# EAGLE board bare_eval (EAGLE 6.4)
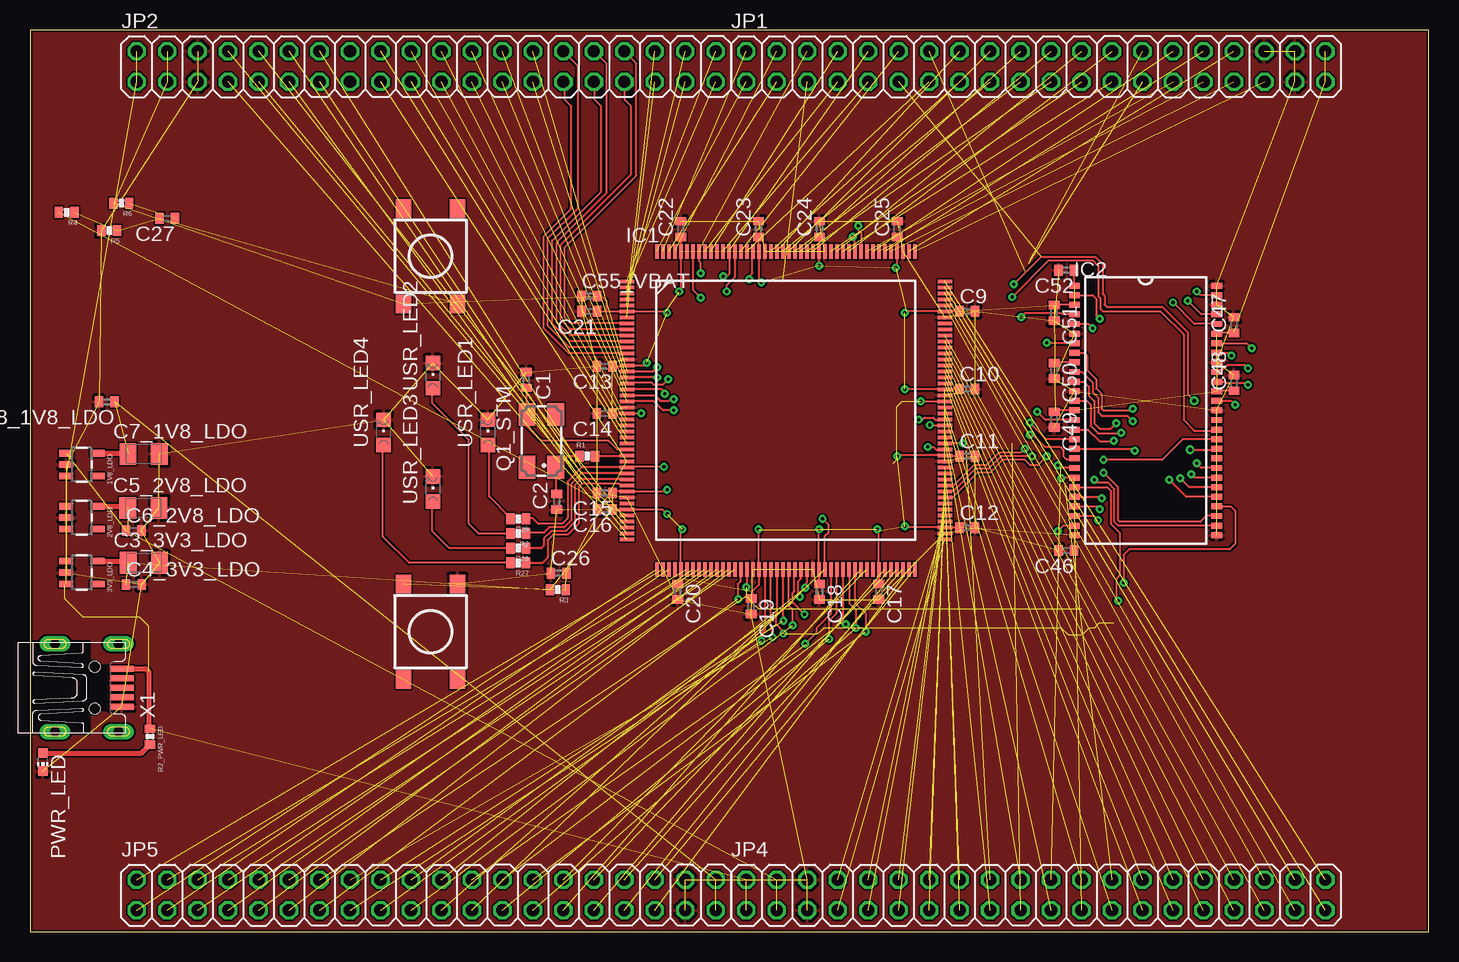
[diagram p0: board, top side]
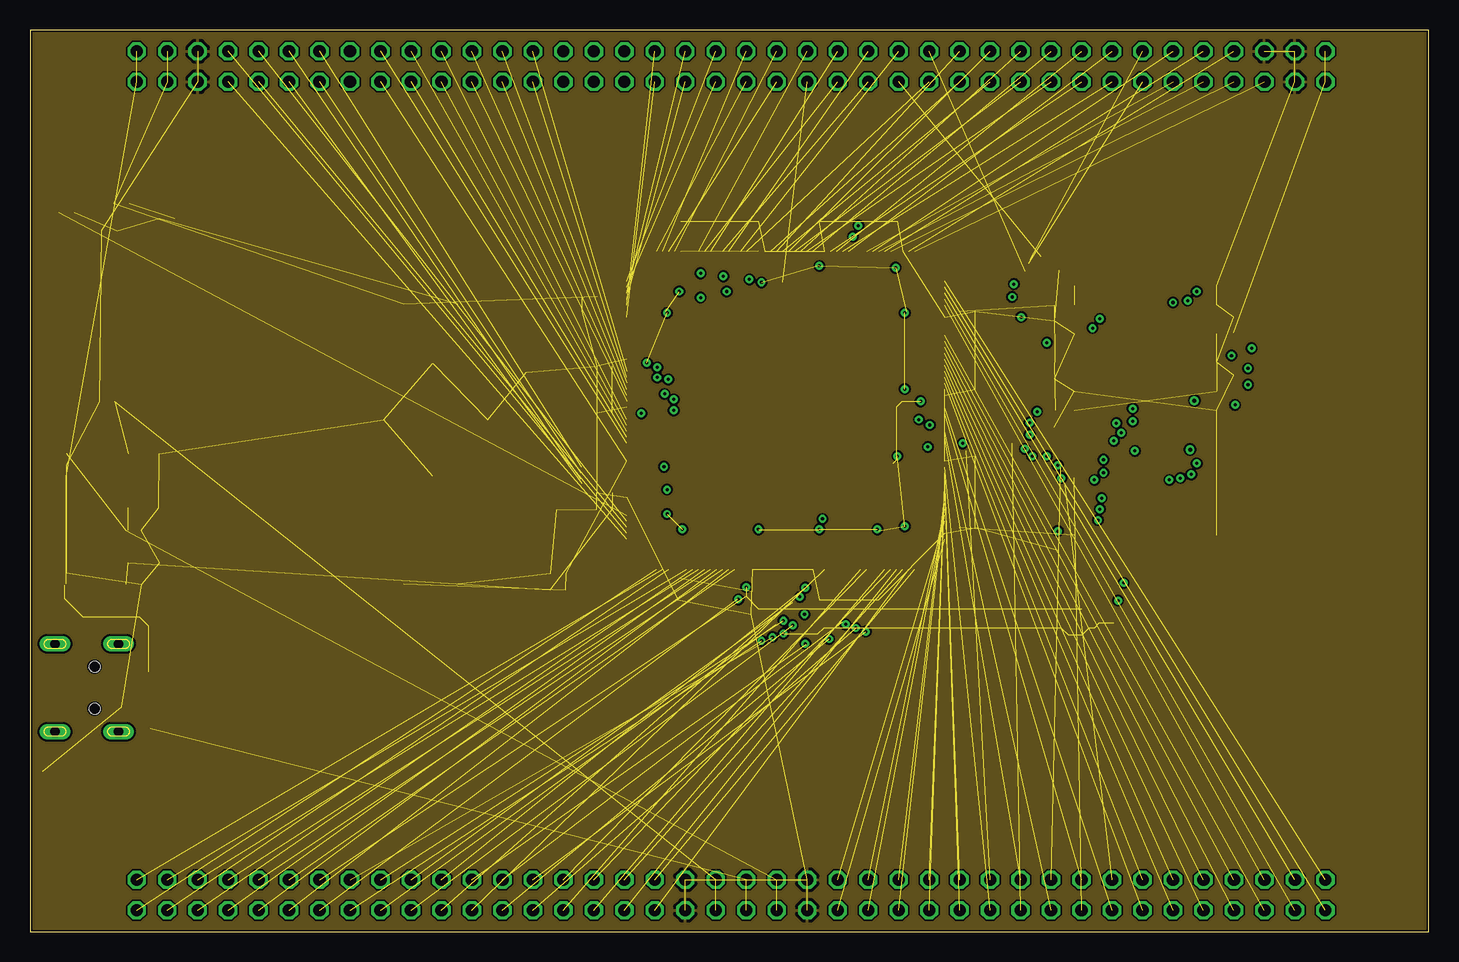
[diagram p1: board, inner layer Route2]
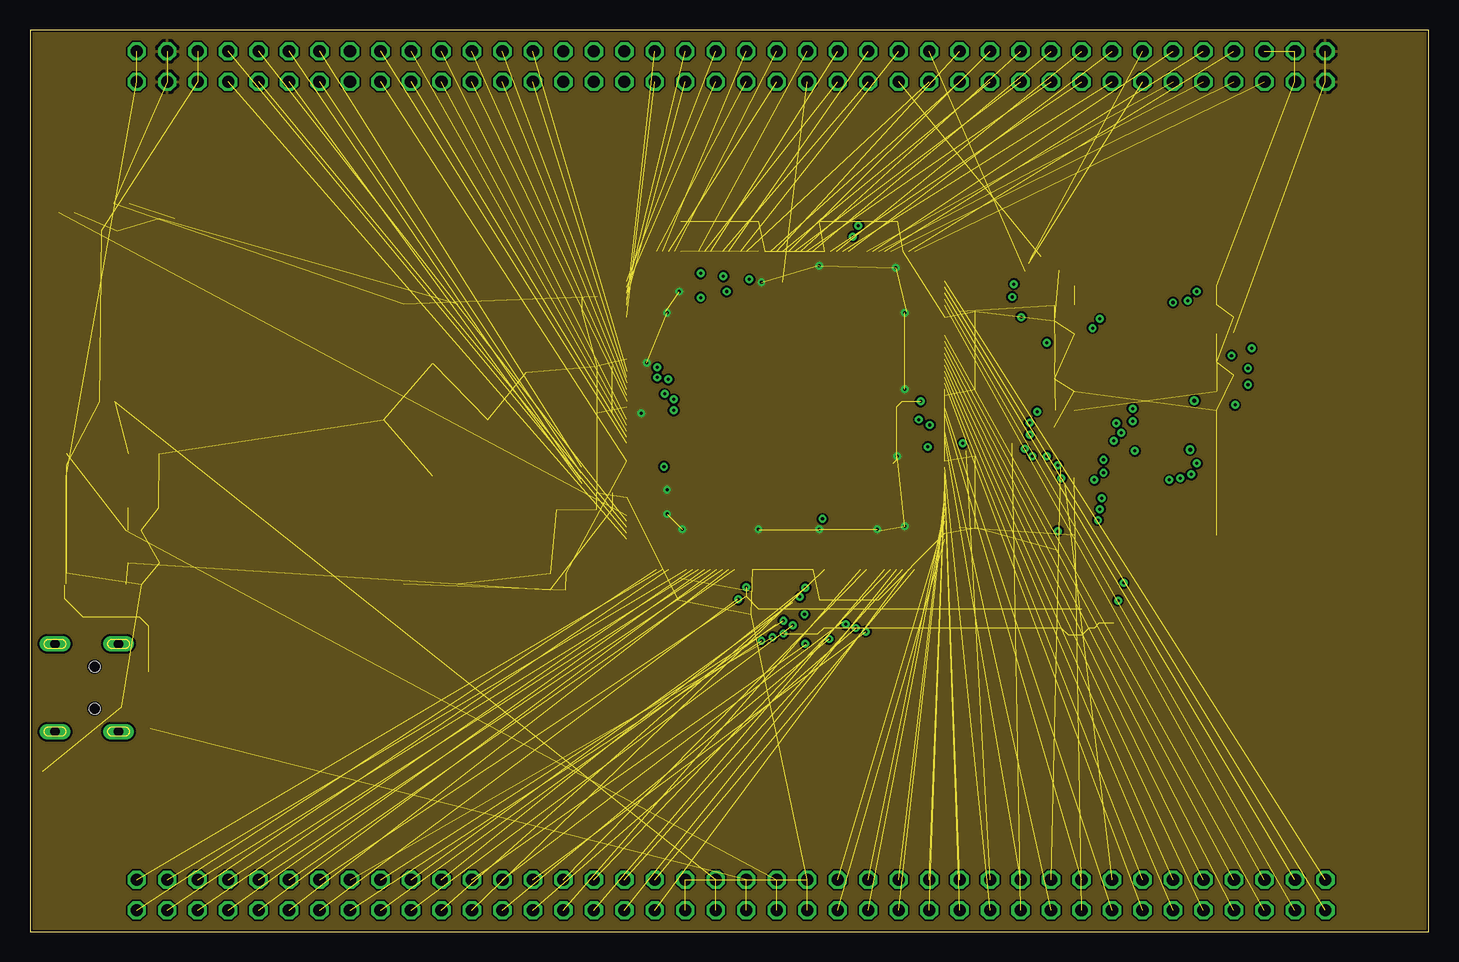
[diagram p2: board, inner layer Route3]
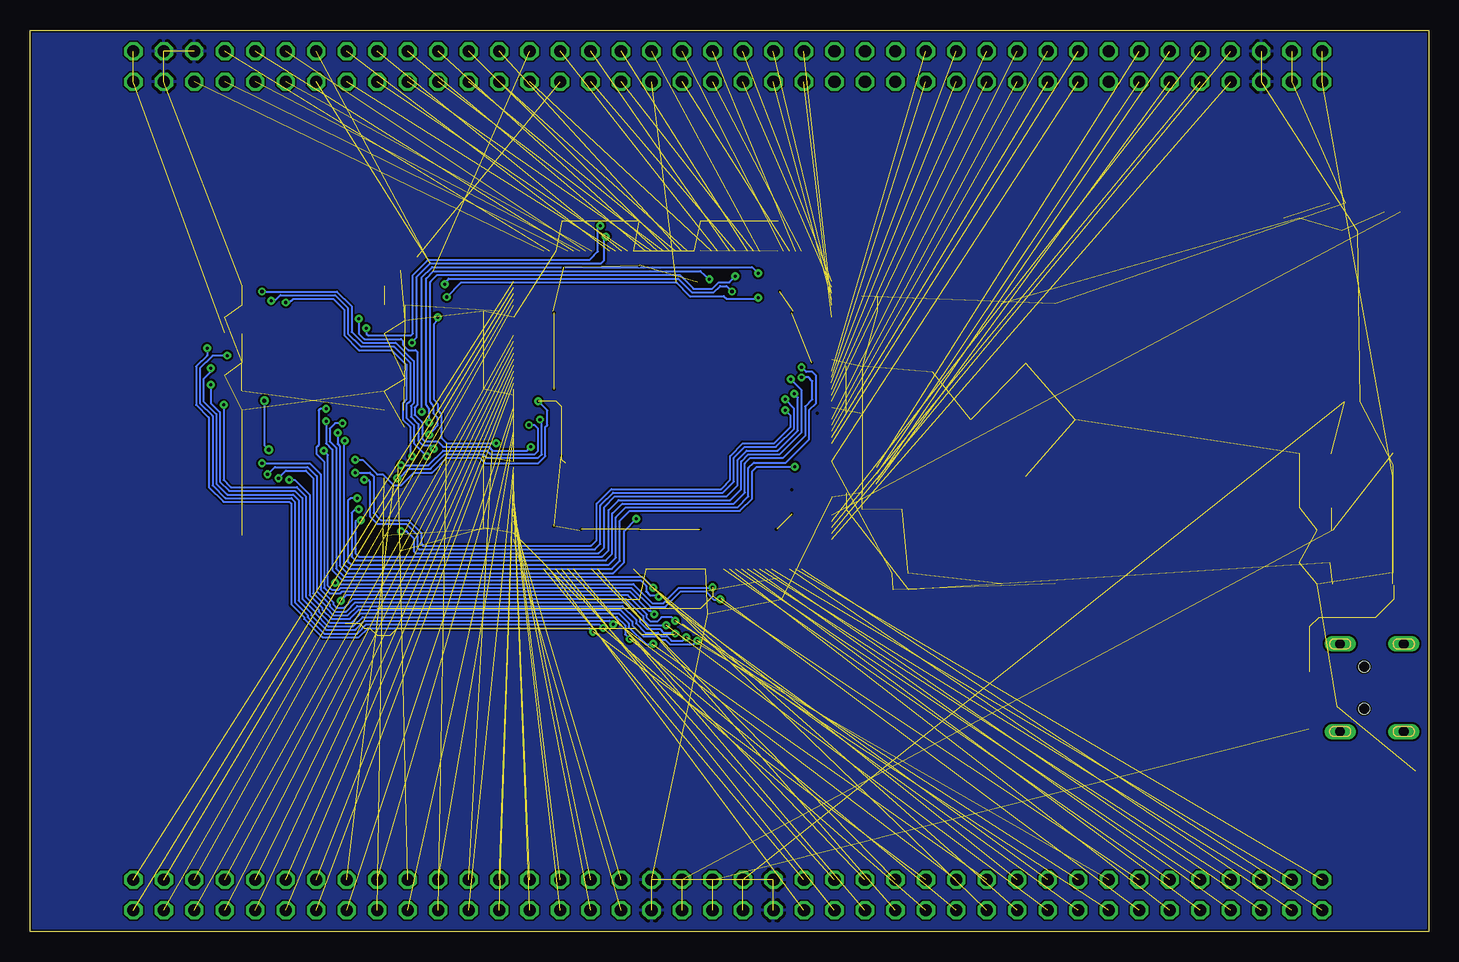
[diagram p3: board, bottom side, seen from below]

Size 116.57 x 75.13 mm. Coordinates in mm from the lower left corner, seen from the top.
Outline: 0,0 116.57,0 116.57,75.13 0,75.13 0,0
Copper layers (1*2*3*16): Top 0.035559375mm / dielectric 0.17018125mm / Route2 0.01778125mm / dielectric 47mil / Route3 0.01778125mm / dielectric 0.17018125mm / Bottom 0.035mm
Design rules "default *": minimum track width 6mil, minimum drill 10mil, track to track 6mil, track to pad 6mil, pad to pad 6mil, via to via 6mil, smd to smd 6mil, copper to edge 6mil, drill to drill 8mil, minimum pad ring 10mil, minimum via ring 8mil, stop-mask expansion 4mil, vias tented up to drill 11mil, thermal gap 10mil

## Footprints (pad centres in the part's own frame; a part is rotated, then mirrored left to right if it is on the bottom)
SOT23-5 = smd 0.55 x 1.2: 1 -0.95,-1.3; 2 0,-1.3; 3 0.95,-1.3; 4 0.95,1.3; 5 -0.95,1.3
C0402 = smd 0.7 x 0.9: 1 -0.65,0; 2 0.65,0
SMC_A = smd 1.4 x 1.8: + -1.3,0; - 1.3,0
LQFP-176 = smd 1.2 x 0.3: 1 -13.25,10.75; 2 -13.25,10.25; 3 -13.25,9.75; 4 -13.25,9.25; 5 -13.25,8.75; 6 -13.25,8.25; 7 -13.25,7.75; 8 -13.25,7.25; 9 -13.25,6.75; 10 -13.25,6.25; 11 -13.25,5.75; 12 -13.25,5.25; 13 -13.25,4.75; 14 -13.25,4.25; 15 -13.25,3.75; 16 -13.25,3.25; 17 -13.25,2.75; 18 -13.25,2.25; 19 -13.25,1.75; 20 -13.25,1.25; 21 -13.25,0.75; 22 -13.25,0.25; 23 -13.25,-0.25; 24 -13.25,-0.75; 25 -13.25,-1.25; 26 -13.25,-1.75; 27 -13.25,-2.25; 28 -13.25,-2.75; 29 -13.25,-3.25; 30 -13.25,-3.75; 31 -13.25,-4.25; 32 -13.25,-4.75; 33 -13.25,-5.25; 34 -13.25,-5.75; 35 -13.25,-6.25; 36 -13.25,-6.75; 37 -13.25,-7.25; 38 -13.25,-7.75; 39 -13.25,-8.25; 40 -13.25,-8.75; 41 -13.25,-9.25; 42 -13.25,-9.75; 43 -13.25,-10.25; 44 -13.25,-10.75; 89 13.25,-10.75; 90 13.25,-10.25; 91 13.25,-9.75; 92 13.25,-9.25; 93 13.25,-8.75; 94 13.25,-8.25; 95 13.25,-7.75; 96 13.25,-7.25; 97 13.25,-6.75; 98 13.25,-6.25; 99 13.25,-5.75; 100 13.25,-5.25; 101 13.25,-4.75; 102 13.25,-4.25; 103 13.25,-3.75; 104 13.25,-3.25; 105 13.25,-2.75; 106 13.25,-2.25; 107 13.25,-1.75; 108 13.25,-1.25; 109 13.25,-0.75; 110 13.25,-0.25; 111 13.25,0.25; 112 13.25,0.75; 113 13.25,1.25; 114 13.25,1.75; 115 13.25,2.25; 116 13.25,2.75; 117 13.25,3.25; 118 13.25,3.75; 119 13.25,4.25; 120 13.25,4.75; 121 13.25,5.25; 122 13.25,5.75; 123 13.25,6.25; 124 13.25,6.75; 125 13.25,7.25; 126 13.25,7.75; 127 13.25,8.25; 128 13.25,8.75; 129 13.25,9.25; 130 13.25,9.75; 131 13.25,10.25; 132 13.25,10.75 | smd 0.3 x 1.2: 45 -10.75,-13.25; 46 -10.25,-13.25; 47 -9.75,-13.25; 48 -9.25,-13.25; 49 -8.75,-13.25; 50 -8.25,-13.25; 51 -7.75,-13.25; 52 -7.25,-13.25; 53 -6.75,-13.25; 54 -6.25,-13.25; 55 -5.75,-13.25; 56 -5.25,-13.25; 57 -4.75,-13.25; 58 -4.25,-13.25; 59 -3.75,-13.25; 60 -3.25,-13.25; 61 -2.75,-13.25; 62 -2.25,-13.25; 63 -1.75,-13.25; 64 -1.25,-13.25; 65 -0.75,-13.25; 66 -0.25,-13.25; 67 0.25,-13.25; 68 0.75,-13.25; 69 1.25,-13.25; 70 1.75,-13.25; 71 2.25,-13.25; 72 2.75,-13.25; 73 3.25,-13.25; 74 3.75,-13.25; 75 4.25,-13.25; 76 4.75,-13.25; 77 5.25,-13.25; 78 5.75,-13.25; 79 6.25,-13.25; 80 6.75,-13.25; 81 7.25,-13.25; 82 7.75,-13.25; 83 8.25,-13.25; 84 8.75,-13.25; 85 9.25,-13.25; 86 9.75,-13.25; 87 10.25,-13.25; 88 10.75,-13.25; 133 10.75,13.25; 134 10.25,13.25; 135 9.75,13.25; 136 9.25,13.25; 137 8.75,13.25; 138 8.25,13.25; 139 7.75,13.25; 140 7.25,13.25; 141 6.75,13.25; 142 6.25,13.25; 143 5.75,13.25; 144 5.25,13.25; 145 4.75,13.25; 146 4.25,13.25; 147 3.75,13.25; 148 3.25,13.25; 149 2.75,13.25; 150 2.25,13.25; 151 1.75,13.25; 152 1.25,13.25; 153 0.75,13.25; 154 0.25,13.25; 155 -0.25,13.25; 156 -0.75,13.25; 157 -1.25,13.25; 158 -1.75,13.25; 159 -2.25,13.25; 160 -2.75,13.25; 161 -3.25,13.25; 162 -3.75,13.25; 163 -4.25,13.25; 164 -4.75,13.25; 165 -5.25,13.25; 166 -5.75,13.25; 167 -6.25,13.25; 168 -6.75,13.25; 169 -7.25,13.25; 170 -7.75,13.25; 171 -8.25,13.25; 172 -8.75,13.25; 173 -9.25,13.25; 174 -9.75,13.25; 175 -10.25,13.25; 176 -10.75,13.25
TSOP-2 = smd 0.9 x 0.49: 1 -5.93,10.4; 2 -5.93,9.6; 3 -5.93,8.8; 4 -5.93,8; 5 -5.93,7.2; 6 -5.93,6.4; 7 -5.93,5.6; 8 -5.93,4.8; 9 -5.93,4; 10 -5.93,3.2; 11 -5.93,2.4; 12 -5.93,1.6; 13 -5.93,0.8; 14 -5.93,0; 15 -5.93,-0.8; 16 -5.93,-1.6; 17 -5.93,-2.4; 18 -5.93,-3.2; 19 -5.93,-4; 20 -5.93,-4.8; 21 -5.93,-5.6; 22 -5.93,-6.4; 23 -5.93,-7.2; 24 -5.93,-8; 25 -5.93,-8.8; 26 -5.93,-9.6; 27 -5.93,-10.4; 28 5.93,-10.4; 29 5.93,-9.6; 30 5.93,-8.8; 31 5.93,-8; 32 5.93,-7.2; 33 5.93,-6.4; 34 5.93,-5.6; 35 5.93,-4.8; 36 5.93,-4; 37 5.93,-3.2; 38 5.93,-2.4; 39 5.93,-1.6; 40 5.93,-0.8; 41 5.93,0; 42 5.93,0.8; 43 5.93,1.6; 44 5.93,2.4; 45 5.93,3.2; 46 5.93,4; 47 5.93,4.8; 48 5.93,5.6; 49 5.93,6.4; 50 5.93,7.2; 51 5.93,8; 52 5.93,8.8; 53 5.93,9.6; 54 5.93,10.4
2X20 = drill 1.016 octagon: 1 -24.13,-1.27; 2 -24.13,1.27; 3 -21.59,-1.27; 4 -21.59,1.27; 5 -19.05,-1.27; 6 -19.05,1.27; 7 -16.51,-1.27; 8 -16.51,1.27; 9 -13.97,-1.27; 10 -13.97,1.27; 11 -11.43,-1.27; 12 -11.43,1.27; 13 -8.89,-1.27; 14 -8.89,1.27; 15 -6.35,-1.27; 16 -6.35,1.27; 17 -3.81,-1.27; 18 -3.81,1.27; 19 -1.27,-1.27; 20 -1.27,1.27; 21 1.27,-1.27; 22 1.27,1.27; 23 3.81,-1.27; 24 3.81,1.27; 25 6.35,-1.27; 26 6.35,1.27; 27 8.89,-1.27; 28 8.89,1.27; 29 11.43,-1.27; 30 11.43,1.27; 31 13.97,-1.27; 32 13.97,1.27; 33 16.51,-1.27; 34 16.51,1.27; 35 19.05,-1.27; 36 19.05,1.27; 37 21.59,-1.27; 38 21.59,1.27; 39 24.13,-1.27; 40 24.13,1.27
CHIP-LED0603 = smd 0.8 x 0.8: A 0,-0.75; C 0,0.75
CTS406 = smd 1.9 x 1.4: 1 -2.2,-1.2; 2 2.2,-1.2; 3 2.2,1.2; 4 -2.2,1.2
0402-RES = smd 0.7 x 0.9: 1 -0.65,0; 2 0.65,0
TACTILE_SWITCH_TALL = smd 1.55 x 1.3: A1 -3.975,-2.25; A2 3.975,-2.25; B1 -3.975,2.25; B2 3.975,2.25
CHIPLED_0805 = smd 1.2 x 1.2: A 0,-1.05; C 0,1.05
UX60-MB-5S8 = smd 2 x 0.5: 1 8.65,1.6; 2 8.65,0.8; 3 8.65,0; 4 8.65,-0.8; 5 8.65,-1.6 | drill 0.8 long: M1 3.1,-3.65; M2 3.1,3.65; M3 8.4,3.65; M4 8.4,-3.65 | hole 0.9: 6.4,-1.75; 6.4,1.75

## Placement (x,y rotation side)
1V8_LDO  V_REG_LDOSMD  [SOT23-5]  4.32,38.91 270 top
2V8_LDO  V_REG_LDOSMD  [SOT23-5]  4.32,34.49 270 top
3V3_LDO  V_REG_LDOSMD  [SOT23-5]  4.32,29.92 270 top
C1  20pF  [C0402]  41.35,45.97 270 top
C2  20pF  [C0402]  43.89,35.81 90 top
C3_3V3_LDO  10uF  [SMC_A]  9.5,30.73 0 top
C4_3V3_LDO  .1uF  [C0402]  8.66,28.93 0 top
C5_2V8_LDO  10uF  [SMC_A]  9.45,35.31 0 top
C6_2V8_LDO  .1uF  [C0402]  8.64,33.43 0 top
C7_1V8_LDO  10uF  [SMC_A]  9.47,39.8 0 top
C8_1V8_LDO  .1uF  [C0402]  6.4,44.15 180 top
C9  100nF  [C0402]  78.11,51.69 0 top
C10  100nF  [C0402]  78.11,45.21 0 top
C11  100nF  [C0402]  78.11,39.62 0 top
C12  100nF  [C0402]  78.11,33.66 0 top
C13  100nF  [C0402]  47.88,47.12 180 top
C14  100nF  [C0402]  47.88,43.18 180 top
C15  100nF  [C0402]  47.88,36.55 180 top
C16  100nF  [C0402]  47.88,35.18 180 top
C17  100nF  [C0402]  70.74,28.32 270 top
C18  100nF  [C0402]  65.79,28.32 270 top
C19  100nF  [C0402]  60.1,27.1 270 top
C20  100nF  [C0402]  53.98,28.32 270 top
C21  100nF  [C0402]  46.61,51.69 180 top
C22  100nF  [C0402]  54.23,58.55 90 top
C23  100nF  [C0402]  60.71,58.55 90 top
C24  100nF  [C0402]  65.79,58.55 90 top
C25  100nF  [C0402]  72.26,58.55 90 top
C26  100nF  [C0402]  44.04,29.87 0 top
C27  100nF  [C0402]  11.43,59.44 180 top
C46  100nF  [C0402]  86.36,31.75 180 top
C47  100nF  [C0402]  100.33,50.55 90 top
C48  100nF  [C0402]  100.33,45.72 90 top
C49  100nF  [C0402]  85.34,42.67 270 top
C50  100nF  [C0402]  85.34,46.74 270 top
C51  100nF  [C0402]  85.34,51.56 270 top
C52  100nF  [C0402]  86.36,55.12 180 top
C55_VBAT  1uF  [C0402]  46.61,52.96 0 top
IC1  STM32F439IIT  [LQFP-176]  62.99,43.43 0 top
IC2  IS42S16400J  [TSOP-2]  92.96,43.43 0 top
JP1  [2X20]  83.82,72.09 0 top
JP2  [2X20]  33.02,72.09 0 top
JP4  [2X20]  83.82,3.05 0 top
JP5  [2X20]  33.02,3.05 0 top
PWR_LED  [CHIP-LED0603]  1.07,14.12 180 top
Q1_STM  8MHz  [CTS406]  42.62,40.89 90 top
R1  220  [0402-RES]  46.43,39.62 0 top
R2  33  [0402-RES]  40.69,33.17 180 top
R2_PWR_LED  [0402-RES]  10.01,16.26 270 top
R3  [0402-RES]  43.99,28.5 180 top
R4  330  [0402-RES]  3.05,59.94 180 top
R5  220K  [0402-RES]  6.6,58.42 180 top
R6  100  [0402-RES]  7.62,60.71 180 top
R26  33  [0402-RES]  40.69,31.95 180 top
R27  33  [0402-RES]  40.69,30.73 180 top
R28  33  [0402-RES]  40.69,34.39 180 top
S1_RST  SWITCH-MOMENTARY-2  [TACTILE_SWITCH_TALL]  33.38,24.99 90 top
S2_USR_WKP  SWITCH-MOMENTARY-2  [TACTILE_SWITCH_TALL]  33.38,56.29 270 top
USR_LED1  [CHIPLED_0805]  38.15,41.61 0 top
USR_LED2  [CHIPLED_0805]  33.58,46.33 0 top
USR_LED3  [CHIPLED_0805]  33.58,36.88 0 top
USR_LED4  [CHIPLED_0805]  29.46,41.61 0 top
X1  MINI-USB-UX60-MB-5S8  [UX60-MB-5S8]  -1.02,20.32 0 top

## Library data of the parts
1V8_LDO 2V8_LDO 3V3_LDO = SparkFun-PowerIC
C1 C2 = resistor
C3_3V3_LDO C5_2V8_LDO C7_1V8_LDO = dp_devices
C4_3V3_LDO C6_2V8_LDO C8_1V8_LDO C9-C27 C46-C52 C55_VBAT = rcl
IC1 = STM32F439IIT
IC2 = IS42S16400J
JP1 JP2 JP4 JP5 = pinhead
PWR_LED = led
Q1_STM = crystal; OC_FARNELL: unknown; OC_NEWARK: unknown
R1 R2 R2_PWR_LED R3-R6 R26-R28 = SparkFun-Passives
S1_RST S2_USR_WKP = SparkFun-Electromechanical
USR_LED1-USR_LED4 = adafruit
X1 = con-hirose; OC_FARNELL: unknown; OC_NEWARK: unknown

## Nets
1V8: 1V8_LDO.5 C7_1V8_LDO.+ C8_1V8_LDO.1 JP5.39 JP5.40
2V8: 1V8_LDO.1 2V8_LDO.5 C5_2V8_LDO.+ C6_2V8_LDO.1 JP4.3 JP4.4
3V3: 3V3_LDO.5 C3_3V3_LDO.+ C4_3V3_LDO.1 C9.1 C10.1 C11.1 C12.1 C13.1 C14.1 C15.1 C16.1 C17.1 C18.1 C19.1 C20.1 C21.1 C22.1 C23.1 C24.1 C25.1 C46.1 C47.1 C48.1 C49.1 C50.1 C51.1 C52.1 C55_VBAT.2 IC1.6 IC1.15 IC1.23 IC1.36 IC1.39 IC1.49 IC1.62 IC1.72 IC1.82 IC1.91 IC1.103 IC1.114 IC1.127 IC1.136 IC1.149 IC1.159 IC1.172 IC2.1 IC2.3 IC2.9 IC2.14 IC2.27 IC2.43 IC2.49 JP1.39 JP1.40 JP2.3 JP2.4 R3.2 R6.2 S2_USR_WKP.A2
GND: 1V8_LDO.2 2V8_LDO.2 3V3_LDO.2 C1.1 C2.1 C3_3V3_LDO.- C4_3V3_LDO.2 C5_2V8_LDO.- C6_2V8_LDO.2 C7_1V8_LDO.- C8_1V8_LDO.2 C9.2 C10.2 C11.2 C12.2 C13.2 C14.2 C15.2 C16.2 C17.2 C18.2 C19.2 C20.2 C21.2 C22.2 C23.2 C24.2 C25.2 C26.1 C46.2 C47.2 C48.2 C49.2 C50.2 C51.2 C52.2 C55_VBAT.1 IC1.14 IC1.22 IC1.37 IC1.61 IC1.71 IC1.90 IC1.102 IC1.113 IC1.126 IC1.135 IC1.148 IC1.158 IC2.6 IC2.12 IC2.28 IC2.41 IC2.46 IC2.52 IC2.54 JP1.36 JP1.37 JP1.38 JP2.5 JP2.6 JP4.5 JP4.6 JP5.37 JP5.38 PWR_LED.C R5.2 S1_RST.A2 USR_LED1.C USR_LED2.C USR_LED3.C USR_LED4.C X1.5
N$1: PWR_LED.A R2_PWR_LED.2
N$2: C2.2 Q1_STM.1 R1.1
N$3: C27.2 R4.1 R5.1 S2_USR_WKP.B2
N$4: C27.1 R6.1
N$12: JP2.16
N$19: R28.2 USR_LED1.A
N$20: R2.2 USR_LED2.A
N$21: R26.2 USR_LED3.A
N$22: R27.2 USR_LED4.A
N$44: JP2.15
NRST: C26.2 IC1.31 JP2.17 R3.1 S1_RST.B2
OSC_IN: C1.2 IC1.29 Q1_STM.3
OSC_OUT: IC1.30 R1.2
PA0_WKUP: IC1.40 R4.2
PA1: IC1.41 JP2.10
PA2: IC1.42 JP2.9
PA3: IC1.47 JP5.3
PA4: IC1.50 JP5.4
PA5: IC1.51 JP5.5
PA6: IC1.52 JP5.6
PA7: IC1.53 JP5.7
PA8: IC1.119 JP4.31
PA9: IC1.120 JP4.32
PA10: IC1.121 JP4.33
PA11: IC1.122 JP4.34
PA12: IC1.123 JP4.35
PA13: IC1.124
PA14: IC1.137 JP1.33
PA15: IC1.138 JP1.32
PB0: IC1.56 JP5.10
PB1: IC1.57 JP5.11
PB2: IC1.58 JP5.12
PB3: IC1.161 JP1.13
PB4: IC1.162 JP1.12
PB5: IC1.163 IC2.37 JP1.11
PB6: IC1.164 IC2.19 JP1.10
PB7: IC1.165 JP1.9
PB8: IC1.167 JP1.8
PB9: IC1.168 JP1.7
PB10: IC1.79 JP5.29
PB11: IC1.80 JP5.30
PB12: IC1.92 JP4.8
PB13: IC1.93 JP4.9
PB14: IC1.94 JP4.10
PB15: IC1.95 JP4.11
PC0: IC1.32 IC2.16 JP2.14 R28.1
PC1: IC1.33 JP2.13 R2.1
PC2: IC1.34 JP2.12 R26.1
PC3: IC1.35 JP2.11 R27.1
PC4: IC1.54 JP5.8
PC5: IC1.55 JP5.9
PC6: IC1.115 JP4.27
PC7: IC1.116 JP4.28
PC8: IC1.117 JP4.29
PC9: IC1.118 JP4.30
PC10: IC1.139 JP1.31
PC11: IC1.140 JP1.30
PC12: IC1.141 JP1.29
PC13: IC1.8 JP2.34
PC14: IC1.9 JP2.33
PC15: IC1.10 JP2.32
PD0: IC1.142 IC2.5 JP1.28
PD1: IC1.143 IC2.7 JP1.27
PD2: IC1.144 JP1.26
PD3: IC1.145 JP1.25
PD4: IC1.146 JP1.24
PD5: IC1.147 JP1.23
PD6: IC1.150 JP1.22
PD7: IC1.151 JP1.21
PD8: IC1.96 IC2.50 JP4.12
PD9: IC1.97 IC2.51 JP4.13
PD10: IC1.98 IC2.53 JP4.14
PD11: IC1.99 JP4.15
PD12: IC1.100 JP4.16
PD13: IC1.101 JP4.17
PD14: IC1.104 IC2.2 JP4.18
PD15: IC1.105 IC2.4 JP4.19
PDR_ON: IC1.171
PE0: IC1.169 IC2.15 JP1.6
PE1: IC1.170 IC2.39 JP1.5
PE2: IC1.1 JP2.40
PE3: IC1.2 JP2.39
PE4: IC1.3 JP2.38
PE5: IC1.4 JP2.37
PE6: IC1.5 JP2.36
PE7: IC1.68 IC2.8 JP5.20
PE8: IC1.69 IC2.10 JP5.21
PE9: IC1.70 IC2.11 JP5.22
PE10: IC1.73 IC2.13 JP5.23
PE11: IC1.74 IC2.42 JP5.24
PE12: IC1.75 IC2.44 JP5.25
PE13: IC1.76 IC2.45 JP5.26
PE14: IC1.77 IC2.47 JP5.27
PE15: IC1.78 IC2.48 JP5.28
PF0: IC1.16 IC2.23 JP2.28
PF1: IC1.17 IC2.24 JP2.27
PF2: IC1.18 IC2.25 JP2.26
PF3: IC1.19 IC2.26 JP2.25
PF4: IC1.20 IC2.29 JP2.24
PF5: IC1.21 IC2.30 JP2.23
PF6: IC1.24 JP2.22
PF7: IC1.25 JP2.21
PF8: IC1.26 JP2.20
PF9: IC1.27 JP2.19
PF10: IC1.28 JP2.18
PF11: IC1.59 IC2.18 JP5.13
PF12: IC1.60 IC2.31 JP5.14
PF13: IC1.63 IC2.32 JP5.15
PF14: IC1.64 IC2.33 JP5.16
PF15: IC1.65 IC2.34 JP5.17
PG0: IC1.66 IC2.22 JP5.18
PG1: IC1.67 IC2.35 JP5.19
PG2: IC1.106 JP4.20
PG3: IC1.107 JP4.21
PG4: IC1.108 IC2.20 JP4.22
PG5: IC1.109 IC2.21 JP4.23
PG6: IC1.110 JP4.24
PG7: IC1.111 JP4.25
PG8: IC1.112 IC2.38 JP4.26
PG9: IC1.152 JP1.20
PG10: IC1.153 JP1.19
PG11: IC1.154 JP1.18
PG12: IC1.155 JP1.17
PG13: IC1.156 JP1.16
PG14: IC1.157 JP1.15
PG15: IC1.160 IC2.17 JP1.14
PH2: IC1.43 JP2.8
PH3: IC1.44 JP2.7
PH4: IC1.45 JP5.1
PH5: IC1.46 JP5.2
PH6: IC1.83 JP5.31
PH7: IC1.84 JP5.32
PH8: IC1.85 JP5.33
PH9: IC1.86 JP5.34
PH10: IC1.87 JP5.35
PH11: IC1.88 JP5.36
PH12: IC1.89 JP4.7
PH13: IC1.128 JP4.36
PH14: IC1.129 JP4.37
PH15: IC1.130 JP4.38
PI0: IC1.131 JP4.39
PI1: IC1.132 JP4.40
PI2: IC1.133 JP1.35
PI3: IC1.134 JP1.34
PI4: IC1.173 JP1.4
PI5: IC1.174 JP1.3
PI6: IC1.175 JP1.2
PI7: IC1.176 JP1.1
PI8: IC1.7 JP2.35
PI9: IC1.11 JP2.31
PI10: IC1.12 JP2.30
PI11: IC1.13 JP2.29
USB_5V: 1V8_LDO.3 2V8_LDO.1 2V8_LDO.3 3V3_LDO.1 3V3_LDO.3 JP2.1 JP2.2 JP4.1 JP4.2 R2_PWR_LED.1 X1.1
VCAP_1: IC1.81
VCAP_2: IC1.125
VREF+: IC1.38

## Tracks (layer width: path | path; a pad name or v marks a point on that pad's centre or on a via)
1V8  (3 unrouted)
  Top 0.406: 1V8_LDO.5 8.17,39.86 C7_1V8_LDO.+
2V8  (4 unrouted)
  Top 0.406: 2V8_LDO.5 8.01,35.44 C5_2V8_LDO.+ | 8.15,33.44 C6_2V8_LDO.1
3V3  (via drill 0.25 layers 1-4)  (32 unrouted)
  Top 0.152: v54.1,53.34 54.24,53.48 IC1.172 54.23,56.7 C22.1 | v65.79,55.47 65.74,55.52 IC1.149 65.79,56.73 C24.1 | v72.14,55.32 72.24,55.43 IC1.136 72.26,56.71 C25.1 | v72.9,33.78 73,33.68 IC1.91 76.27,33.66 C12.1 | v72.29,39.62 72.35,39.68 IC1.103 76.3,39.62 C11.1 | v72.9,45.21 72.93,45.18 IC1.114 76.27,45.21 C10.1 | v72.9,51.56 73.02,51.68 IC1.127 C9.1 | v53.09,34.8 52.7,35.18 IC1.39 C16.1 | v53.09,36.83 52.94,36.68 IC1.36 48.66,36.68 C15.1 | v54.36,33.53 54.24,33.41 IC1.49 54.23,30.17 54.23,29.46 53.98,29.21 C20.1 | v60.71,33.53 60.74,33.49 IC1.62 60.74,28.89 60.2,28.35 60.2,27.85 C19.1 | v65.79,33.53 65.74,33.48 IC1.72 65.74,29.02 C18.1 | v70.61,33.53 70.74,33.4 IC1.82 C17.1 | C13.1 49.67,47.12 IC1.15 51.2,47.18 v51.41,47.4 | C14.1 IC1.23 v50.95,43.18 | C23.1 60.71,56.72 IC1.159 60.74,54.32 v60.96,54.1 | v53.09,51.56 52.96,51.68 IC1.6 48.01,51.69 | C21.1 48.01,51.69 | C55_VBAT.2 47.62,52.96 48.01,52.58 48.01,51.69 | IC2.1 87.03,55.09 C52.1 | IC2.27 87.03,31.77 C46.1 | C48.1 98.93,45.07 IC2.43 | C47.1 98.96,49.9 IC2.49 | IC2.3 85.58,52.23 C51.1 | IC2.9 85.39,47.43 C50.1 | IC2.14 85.46,43.43 C49.1
  Top 0.406: 3V3_LDO.5 7.91,30.87 C3_3V3_LDO.+
  pour Route3 (isolate 0.152, rank 6): 116.33,74.88 0.25,74.88 0.25,0.25 116.33,0.25
GND  (72 unrouted)
  pour Bottom (isolate 0.152, rank 6): 116.33,74.88 0.25,74.88 0.25,0.25 116.33,0.25
  pour Route2 (isolate 0.152, rank 6): 116.33,74.88 0.25,74.88 0.25,0.25 116.33,0.25
  pour Top (isolate 0.152, rank 6): 0.25,74.88 0.25,0.25 116.33,0.25 116.33,74.88
N$1
  Top 0.406: PWR_LED.A 9.27,14.87 R2_PWR_LED.2
N$2
  Top 0.152: R1.1 44.75,39.62 Q1_STM.1 43.82,36.53
  Top 0.203: 44.16,38.35 Q1_STM.1 | 43.82,36.53 C2.2
N$3  (3 unrouted)
N$4  (1 unrouted)
N$19
  Top 0.152: R28.2 40.04,34.48 38.25,36.27 38.25,40.45 USR_LED1.A
N$20
  Top 0.152: USR_LED2.A 33.53,45.23 33.53,44.04 36.58,41 36.58,33.98 37.39,33.17 R2.2
N$21
  Top 0.152: R26.2 34.95,31.95 33.53,33.38 33.53,35.78 USR_LED3.A
N$22
  Top 0.152: R27.2 31.6,30.73 29.41,32.92 29.41,40.5 USR_LED4.A
NRST  (4 unrouted)
OSC_IN
  Top 0.152: IC1.29 48.92,40.18 48.21,40.89 42.62,40.89 41.35,42.16 | C1.2 41.35,43.16
  Top 0.203: 41.35,42.16 41.35,43.02 Q1_STM.3 41.35,43.16
OSC_OUT
  Top 0.152: 49.68,39.62 R1.2
  Top 0.203: 49.68,39.62 IC1.30
PA0_WKUP  (1 unrouted)
PA1  (1 unrouted)
PA2  (1 unrouted)
PA3  (1 unrouted)
PA4  (1 unrouted)
PA5  (1 unrouted)
PA6  (1 unrouted)
PA7  (1 unrouted)
PA8  (1 unrouted)
PA9  (1 unrouted)
PA10  (1 unrouted)
PA11  (1 unrouted)
PA12  (1 unrouted)
PA14  (1 unrouted)
PA15  (1 unrouted)
PB0  (1 unrouted)
PB1  (1 unrouted)
PB2  (1 unrouted)
PB3  (1 unrouted)
PB4  (1 unrouted)
PB5  (via drill 0.25, 0.33)  (1 unrouted)
  Top 0.152: v81.99,53.95 84.28,56.24 88.77,56.24 89.38,55.63 89.38,53.14 89.56,52.96 89.56,52.25 89.74,52.07 94.36,52.07 96.5,49.94 96.5,44.78 v97.03,44.25 | v58.06,53.34 58.06,53.87 58.75,54.56 58.75,56.68 IC1.163 | v96.67,40.16 98.82,40.16 IC2.37
  Bottom 0.152: v81.99,53.95 81.99,54.1 81.69,54.41 62.56,54.41 61.42,53.26 59.59,53.26 59.06,53.8 58.52,53.8 v58.06,53.34 | v97.03,44.25 97.03,40.51 v96.67,40.16
PB6  (via drill 0.25)  (1 unrouted)
  Top 0.152: v57.78,54.61 58.04,54.61 58.29,54.86 58.29,56.63 IC1.164 | v83.31,41.4 83.57,41.4 84.58,40.39 85.85,40.39 86.11,40.13 86.11,39.62 86.36,39.37 86.97,39.37 IC2.19
  Bottom 0.152: v57.78,54.61 58.29,54.1 59.18,54.1 59.72,53.57 61.27,53.57 62.43,54.74 82.63,54.74 83.21,54.15 83.21,44.09 82.96,43.76 82.96,43.18 82.63,42.85 82.63,42.16 v83.31,41.4
PB7  (1 unrouted)
PB8  (1 unrouted)
PB9  (1 unrouted)
PB10  (1 unrouted)
PB11  (1 unrouted)
PB12  (1 unrouted)
PB13  (1 unrouted)
PB14  (1 unrouted)
PB15  (1 unrouted)
PC0  (via drill 0.25)  (1 unrouted)
  Top 0.152: v52.83,38.73 49.79,38.73 IC1.32 46,38.68 44.81,37.49 44.81,34.44 44.35,33.98 42.37,33.98 41.91,34.44 41.39,34.44 R28.1 | IC2.16 88.16,41.83 89.15,40.84 90.27,40.84 v90.32,40.89
  Bottom 0.152: v52.83,38.73 56.01,38.73 56.39,38.35 56.39,36.07 57.4,35.05 66.6,35.05 67.41,34.24 67.41,30.89 68.07,30.23 90.02,30.23 90.42,30.63 90.42,40.79 v90.32,40.89
PC1  (1 unrouted)
  Top 0.152: IC1.33 45.96,38.18 45.11,37.34 45.11,34.29 44.5,33.68 43.28,33.68 42.82,33.22 41.39,33.22 R2.1
PC2  (1 unrouted)
  Top 0.152: IC1.34 45.91,37.68 45.42,37.19 45.42,34.14 44.65,33.38 43.43,33.38 42.82,32.77 42.82,32.16 42.6,31.93 41.37,31.93 R26.1
PC3  (1 unrouted)
  Top 0.152: IC1.35 49.23,37.18 49.07,37.34 46.03,37.34 45.72,37.03 45.72,33.98 44.81,33.07 43.59,33.07 43.13,32.61 43.13,31.17 42.67,30.71 41.37,30.71 R27.1
PC4  (1 unrouted)
PC5  (1 unrouted)
PC6  (1 unrouted)
PC7  (1 unrouted)
PC8  (1 unrouted)
PC9  (1 unrouted)
PC10  (1 unrouted)
PC11  (1 unrouted)
PC12  (1 unrouted)
PC13
  Top 0.178: IC1.8 45.07,50.68 44.58,51.18 44.58,57.05 50.53,63.01 50.53,72.35 JP2.34
PC14
  Top 0.178: IC1.9 45.04,50.18 44.22,51 44.22,57.23 50.09,63.09 50.09,68.78 49.56,69.32 49.56,70.79 JP2.33
PC15
  Top 0.178: IC1.10 45.01,49.68 43.87,50.83 43.87,57.4 48.04,61.58 48.04,72.3 JP2.32
PD0  (via drill 0.25)  (1 unrouted)
  Top 0.152: IC2.5 88.2,50.63 v88.54,50.29 | v69.04,58.83 69.04,58.45 69.27,58.22 69.27,56.71 IC1.142
  Bottom 0.152: v88.54,50.29 88.54,49.84 88.39,49.68 84.81,49.68 84.66,49.84 84.66,54.71 83.36,56.01 69.92,56.01 IC1.142 69.24,58.62 v69.04,58.83
PD1  (via drill 0.25)  (1 unrouted)
  Top 0.152: IC2.7 84.77,49.03 v84.73,49.07 | IC1.143 68.73,56.69 68.73,57.76 v68.58,57.91
  Bottom 0.152: v84.73,49.07 84.73,49.15 84.35,49.53 84.35,54.56 83.21,55.7 68.96,55.7 68.73,55.93 68.73,57.76 v68.58,57.91
PD2  (1 unrouted)
PD3  (1 unrouted)
PD4  (1 unrouted)
PD5  (1 unrouted)
PD6  (1 unrouted)
PD7  (1 unrouted)
PD8  (via drill 0.25)  (1 unrouted)
  Top 0.152: IC2.50 97.04,50.63 v95.25,52.43 | v84.73,39.62 83.97,38.86 83.36,38.86 82.91,39.32 81.08,39.32 80.01,38.25 78.94,38.25 76.89,36.2 IC1.96
  Bottom 0.152: v95.25,52.43 94.94,52.43 94.64,52.73 91.29,52.73 90.37,51.82 90.37,49.68 89.15,48.46 86.41,48.46 85.19,47.24 85.19,44.35 85.5,44.04 85.5,42.67 84.89,42.06 84.89,39.78 v84.73,39.62
PD9  (via drill 0.25)  (1 unrouted)
  Top 0.152: IC2.51 97.61,51.43 v96.47,52.58 | v83.52,39.62 80.92,39.62 79.86,38.56 78.79,38.56 76.96,36.73 76.29,36.73 IC1.97
  Bottom 0.152: v96.47,52.58 96.16,52.58 95.71,53.04 91.13,53.04 90.07,51.97 90.07,49.84 89,48.77 86.26,48.77 84.89,47.4 84.89,44.2 85.19,43.89 85.19,42.82 84.58,42.22 84.58,40.69 v83.52,39.62
PD10  (via drill 0.25)  (1 unrouted)
  Top 0.152: IC2.53 97.54,53.03 v97.23,53.34 | IC1.98 76.96,37.18 78.64,38.86 79.7,38.86 80.77,39.93 82.6,39.93 v82.91,40.23
  Bottom 0.152: v97.23,53.34 90.98,53.34 89.76,52.12 89.76,49.99 88.85,49.07 86.11,49.07 84.58,47.55 84.58,44.04 84.81,43.82 84.81,42.9 84.2,42.29 84.2,40.92 83.82,40.54 83.21,40.54 v82.91,40.23
PD11  (1 unrouted)
PD12  (1 unrouted)
PD13  (1 unrouted)
PD14  (via drill 0.25)  (1 unrouted)
  Top 0.152: IC2.2 88.55,53.03 88.85,52.73 88.85,51.36 v89.15,51.05 | v74.83,40.39 75.29,40.39 75.51,40.16 76.22,40.16 IC1.104
  Bottom 0.152: v89.15,51.05 89.15,49.84 88.7,49.38 85.65,49.38 85.5,49.23 85.5,48.92 85.04,48.46 84.43,48.46 84.28,48.31 84.28,43.89 84.51,43.66 84.51,43.05 83.9,42.44 83.9,41.07 83.67,40.84 82.6,40.84 82.14,40.39 78.33,40.39 78.03,40.08 75.13,40.08 v74.83,40.39
PD15  (via drill 0.25)  (1 unrouted)
  Top 0.152: IC2.4 86.03,51.43 85.95,51.51 82.91,51.51 v82.6,51.21 | v77.72,40.69 IC1.105
  Bottom 0.152: v82.6,51.21 82.6,50.98 82.91,50.6 82.91,44.35 82.6,43.97 82.6,43.43 82.3,43.13 82.3,41.15 81.84,40.69 v77.72,40.69
PE0  (via drill 0.25)  (1 unrouted)
  Top 0.152: IC2.15 84.62,42.63 v83.92,43.33 | v55.88,54.86 55.88,55.75 55.75,55.88 55.75,56.67 IC1.169
  Bottom 0.152: v83.92,43.33 83.92,54.51 83.06,55.37 56.39,55.37 v55.88,54.86
PE1  (via drill 0.25)  (1 unrouted)
  Top 0.152: IC1.170 55.24,53.47 v55.88,52.83 | v81.84,52.88 84.89,55.93 88.54,55.93 89.03,55.45 89.03,52.96 89.21,52.78 89.21,51.89 89.38,51.71 94.18,51.71 96.14,49.76 96.14,42.65 97.03,41.76 98.82,41.76 IC2.39
  Bottom 0.152: v81.84,52.88 80.62,54.1 62.71,54.1 61.57,52.96 58.75,52.96 58.52,52.73 55.98,52.73 v55.88,52.83
PE2  (1 unrouted)
PE3  (1 unrouted)
PE4  (1 unrouted)
PE5  (1 unrouted)
PE6  (1 unrouted)
PE7  (via drill 0.25)  (1 unrouted)
  Top 0.152: IC2.8 87.86,48.23 88.09,48.01 88.09,46.79 88.85,46.02 88.85,45.26 89.31,44.81 89.31,43.59 89.46,43.43 91.75,43.43 v91.9,43.59 | v64.54,26.44 63.55,27.43 63.55,28.19 63.7,28.35 63.7,30.15 IC1.68
  Bottom 0.152: v91.9,43.59 92.35,43.59 92.51,43.43 92.51,40.54 92.66,40.39 92.66,39.78 92.05,39.17 92.05,28.65 91.59,28.19 90.68,28.19 90.53,28.35 66.6,28.35 65,26.75 64.85,26.75 v64.54,26.44
PE8  (via drill 0.25)  (1 unrouted)
  Top 0.152: IC2.10 87.63,46.63 88.54,45.72 88.54,44.96 89,44.5 89,43.28 89.31,42.98 91.44,42.98 v91.9,42.52 | IC1.69 64.24,29.41 64.01,29.19 64.01,28.04 v64.16,27.89
  Bottom 0.152: v91.9,42.52 91.9,40.69 91.36,40.16 91.36,30.1 90.53,29.26 65.68,29.26 65.23,28.8 65.23,28.35 64.92,28.04 64.31,28.04 v64.16,27.89
PE9  (via drill 0.25)  (1 unrouted)
  Top 0.152: IC2.11 87.82,45.83 88.24,45.41 88.24,44.65 88.7,44.2 88.7,42.37 89.15,41.91 90.07,41.91 v90.53,42.37 | v64.62,28.65 64.62,28.96 64.77,29.11 64.77,30.16 IC1.70
  Bottom 0.152: v90.53,42.37 91.13,42.37 91.59,41.91 91.59,40.84 91.06,40.31 91.06,30.25 90.37,29.57 65.53,29.57 v64.62,28.65
PE10  (via drill 0.25)  (1 unrouted)
  Top 0.152: IC1.73 66.24,32.97 66.55,33.27 66.55,33.88 v66.04,34.39 | IC2.13 88.05,44.23 88.39,43.89 88.39,42.14 89,41.53 90.91,41.53 v90.93,41.55
  Bottom 0.152: v66.04,34.39 67.06,33.38 67.06,30.79 67.97,29.87 90.12,29.87 90.75,30.51 90.75,40.46 90.93,40.64 v90.93,41.55
PE11  (via drill 0.25)  (1 unrouted)
  Top 0.152: IC2.42 100.09,44.23 v100.43,43.89 | IC1.74 66.75,30.18 66.75,26.52 65.53,25.3 65.53,24.92 v64.62,24
  Bottom 0.152: v100.43,43.89 100.43,37.64 99.82,37.03 94.34,37.03 93.57,36.27 93.57,27.89 92.51,26.82 92.51,26.67 91.59,25.76 89.76,25.76 89,26.52 67.51,26.52 66.67,25.68 66.67,25.38 65.23,23.93 64.69,23.93 v64.62,24
PE12  (via drill 0.25)  (1 unrouted)
  Top 0.152: IC2.44 99.56,45.83 99.67,45.72 101.35,45.72 v101.5,45.57 | IC1.75 67.21,30.15 67.21,26.52 66.6,25.91 v66.6,24.38
  Bottom 0.152: v101.5,45.57 101.5,44.04 100.74,43.28 100.74,37.49 99.97,36.73 94.49,36.73 93.88,36.12 93.88,27.74 92.81,26.67 92.81,26.52 91.75,25.45 89.61,25.45 88.85,26.21 67.67,26.21 66.98,25.53 66.98,24.77 v66.6,24.38
PE13  (via drill 0.25)  (1 unrouted)
  Top 0.152: IC2.45 99.21,46.63 99.82,47.24 101.19,47.24 v101.5,46.94 | IC1.76 | IC1.76 67.74,25.83 v67.97,25.6
  Bottom 0.152: v101.5,46.94 101.5,46.63 102.11,46.02 102.11,44.2 101.04,43.13 101.04,37.34 100.13,36.42 94.64,36.42 94.18,35.97 94.18,27.58 93.12,26.52 93.12,26.37 91.9,25.15 89.46,25.15 88.7,25.91 68.28,25.91 v67.97,25.6
PE14  (via drill 0.25)  (1 unrouted)
  Top 0.152: IC2.47 99.9,48.23 v100.13,48.01 | IC1.77 68.28,30.15 68.28,27.36 68.81,26.82 v68.81,25.3
  Bottom 0.152: v100.13,48.01 101.35,48.01 102.41,46.94 102.41,44.04 101.35,42.98 101.35,37.19 100.28,36.12 94.79,36.12 94.49,35.81 94.49,27.43 93.42,26.37 93.42,26.21 92.05,24.84 89.31,24.84 88.54,25.6 69.11,25.6 v68.81,25.3
PE15  (via drill 0.25)  (1 unrouted)
  Top 0.152: IC2.48 101.38,49.03 v101.8,48.62 | 68.73,30.17 IC1.78 68.74,27.42 69.65,26.52 v69.65,24.99
  Bottom 0.152: v101.8,48.62 101.8,48.01 102.72,47.09 102.72,43.89 101.65,42.82 101.65,37.03 100.43,35.81 94.94,35.81 94.79,35.66 94.79,27.28 93.73,26.21 93.73,26.06 92.2,24.54 89.15,24.54 88.39,25.3 69.95,25.3 v69.65,24.99
PF0  (via drill 0.25)  (1 unrouted)
  Top 0.152: IC2.23 89.19,36.23 v89.31,36.12 | IC1.16 49.77,46.71 51.97,46.71 v52.27,47.02
  Bottom 0.152: v89.31,36.12 89.84,36.12 90.07,35.89 90.07,30.86 89.76,30.56 68.35,30.56 67.74,31.17 67.74,34.52 66.9,35.36 57.61,35.36 56.69,36.27 56.69,38.63 56.24,39.09 53.57,39.09 51.66,41 51.66,43.43 51.05,44.04 51.05,46.33 51.36,46.63 51.89,46.63 v52.27,47.02
PF1  (via drill 0.25)  (1 unrouted)
  Top 0.152: IC2.24 88.92,35.43 v89.15,35.2 | v52.27,46.18 49.75,46.18 IC1.17
  Bottom 0.152: v89.15,35.2 89.46,35.2 89.76,34.9 89.76,31.24 89.46,30.94 68.58,30.94 68.05,31.47 68.05,34.82 67.21,35.66 57.91,35.66 57,36.58 57,39.01 56.54,39.47 53.8,39.47 51.97,41.3 51.97,43.74 51.36,44.35 51.36,45.87 51.66,46.18 v52.27,46.18
PF2  (via drill 0.25)  (1 unrouted)
  Top 0.152: IC2.25 88.66,34.63 v89,34.29 | v53.19,46.02 52.73,45.57 51.97,45.57 51.82,45.72 49.78,45.72 IC1.18
  Bottom 0.152: v89,34.29 89.31,34.29 89.46,34.14 89.46,31.55 89.15,31.24 68.89,31.24 68.35,31.77 68.35,35.13 67.51,35.97 58.22,35.97 57.3,36.88 57.3,39.17 56.69,39.78 54.1,39.78 52.27,41.61 52.27,45.11 v53.19,46.02
PF3  (via drill 0.25)  (1 unrouted)
  Top 0.152: IC2.26 86.11,33.83 v85.65,33.38 | v52.88,44.81 52.88,44.96 52.65,45.19 IC1.19
  Bottom 0.152: v85.65,33.38 85.19,33.38 84.58,32.77 84.58,31.7 84.43,31.55 69.19,31.55 68.73,32 68.73,35.36 67.82,36.27 58.52,36.27 57.61,37.19 57.61,39.32 56.84,40.08 54.25,40.08 52.58,41.76 52.58,44.5 v52.88,44.81
PF4  (via drill 0.25)  (1 unrouted)
  Top 0.152: IC2.29 90.68,33.83 90.37,34.14 90.37,36.88 89.84,37.41 88.93,37.41 v88.7,37.64 | v53.64,44.35 53.34,44.35 53.19,44.2 52.58,44.2 52.12,44.65 49.77,44.65 IC1.20
  Bottom 0.152: v88.7,37.64 88.39,37.64 88.24,37.49 88.24,34.59 87.63,33.98 85.19,33.98 84.28,33.07 84.28,32 84.12,31.85 69.49,31.85 69.04,32.31 69.04,35.51 67.97,36.58 58.83,36.58 57.91,37.49 57.91,39.47 57,40.39 54.41,40.39 52.88,41.91 52.88,43.59 v53.64,44.35
PF5  (via drill 0.25)  (1 unrouted)
  Top 0.152: IC2.30 98.03,34.63 97.54,34.14 90.83,34.14 90.68,34.29 90.68,37.03 v89.46,38.25 | v53.64,43.43 52.73,43.43 51.97,44.2 IC1.21
  Bottom 0.152: v89.46,38.25 88.24,38.25 87.94,37.95 87.94,34.9 87.32,34.29 85.04,34.29 83.97,33.22 83.97,32.31 83.82,32.16 69.8,32.16 69.34,32.61 69.34,35.66 68.12,36.88 58.98,36.88 58.22,37.64 58.22,39.62 57.15,40.69 54.56,40.69 53.19,42.06 53.19,42.98 v53.64,43.43
PF6  (1 unrouted)
PF7  (1 unrouted)
PF8  (1 unrouted)
PF9  (1 unrouted)
PF10  (1 unrouted)
PF11  (via drill 0.25)  (1 unrouted)
  Top 0.152: IC1.59 59.18,30.12 59.18,29.16 58.98,28.96 58.98,27.74 v59.03,27.69 | IC2.18 91.9,40.23 v92.07,40.06
  Bottom 0.152: v92.07,40.06 91.75,39.73 91.75,28.8 91.44,28.5 90.83,28.5 90.68,28.65 66.45,28.65 64.85,27.05 63.63,27.05 62.33,28.35 60.27,28.35 59.59,27.66 59.06,27.66 v59.03,27.69
PF12  (via drill 0.25)  (4 unrouted)
  Top 0.152: IC1.60 59.74,28.75 v59.69,28.7 | IC2.31 100.05,35.43 100.43,35.05 100.43,32.31 99.97,31.85 91.59,31.85 91.13,31.39 v91.13,29.06
  Bottom 0.152: v91.13,29.06 90.93,29.06 90.83,28.96 66.29,28.96 64.69,27.36 63.78,27.36 62.48,28.65 59.74,28.65 v59.69,28.7
PF13  (via drill 0.25)  (1 unrouted)
  Top 0.152: IC2.32 96.35,36.23 v94.94,37.64 | v60.96,24.23 60.96,24.84 61.27,25.15 61.27,30.16 IC1.63
  Bottom 0.152: v94.94,37.64 94.49,37.64 93.27,36.42 93.27,28.04 92.2,26.98 92.2,26.82 91.44,26.06 89.92,26.06 89.15,26.82 67.36,26.82 66.37,25.83 66.37,25.53 65.46,24.61 64.39,24.61 64.08,24.31 63.63,24.31 63.25,23.93 61.27,23.93 v60.96,24.23
PF14  (via drill 0.25)  (1 unrouted)
  Top 0.152: IC2.33 96.62,37.03 v95.86,37.8 | v61.87,24.54 61.87,25.3 61.72,25.45 61.72,30.16 IC1.64
  Bottom 0.152: v95.86,37.8 95.25,38.41 93.57,38.41 92.96,37.8 92.96,28.19 91.9,27.13 91.9,26.98 91.29,26.37 90.07,26.37 89.31,27.13 67.21,27.13 66.06,25.98 66.06,25.68 65.3,24.92 64.24,24.92 63.93,24.61 63.48,24.61 63.09,24.23 62.18,24.23 v61.87,24.54
PF15  (via drill 0.25)  (11 unrouted)
  Top 0.152: IC2.34 97.04,37.83 v96.77,38.1 | v62.79,24.84 62.79,24.99 62.18,25.6 62.18,26.52 62.25,26.59 62.25,30.17 IC1.65
  Bottom 0.152: v96.77,38.1 96.16,38.71 93.42,38.71 92.66,37.95 92.66,28.35 91.59,27.28 91.59,27.13 91.13,26.67 90.22,26.67 89.46,27.43 67.06,27.43 65.76,26.14 65.76,25.83 65.15,25.22 64.08,25.22 63.78,24.92 62.87,24.92 v62.79,24.84
PG0  (via drill 0.25)  (1 unrouted)
  Top 0.152: IC2.22 89.76,37.03 90.07,36.73 90.07,33.98 90.83,33.22 90.83,29.72 90.53,29.41 90.53,27.74 v90.68,27.58 | v62.79,25.91 62.79,30.14 IC1.66
  Bottom 0.152: v62.79,25.91 63.09,26.21 63.93,26.21 64.31,25.83 64.85,25.83 65.15,26.14 65.15,26.44 66.75,28.04 90.22,28.04 v90.68,27.58
PG1  (via drill 0.25)  (1 unrouted)
  Top 0.152: IC2.35 97.61,38.63 v97.23,39.01 | v63.55,25.53 63.55,26.82 63.25,27.13 IC1.67
  Bottom 0.152: v97.23,39.01 93.27,39.01 92.35,38.1 92.35,28.5 91.29,27.43 91.29,27.28 90.98,26.98 90.37,26.98 89.61,27.74 66.9,27.74 65.46,26.29 65.46,25.98 65,25.53 v63.55,25.53
PG2  (1 unrouted)
PG3  (1 unrouted)
PG4  (via drill 0.25)  (1 unrouted)
  Top 0.152: IC2.20 85.88,38.63 v85.65,38.86 | v74.98,42.22 76.21,42.22 IC1.108
  Bottom 0.152: v85.65,38.86 83.36,38.86 82.14,40.08 78.49,40.08 78.18,39.78 74.52,39.78 74.22,40.08 74.22,41.91 74.52,42.22 v74.98,42.22
PG5  (via drill 0.25)  (1 unrouted)
  Top 0.152: IC2.21 85.99,37.83 v85.95,37.8 | v74.07,42.67 74.37,42.67 74.52,42.82 75.29,42.82 75.44,42.67 76.23,42.67 IC1.109
  Bottom 0.152: v85.95,37.8 85.8,37.8 85.04,38.56 83.21,38.56 81.99,39.78 78.79,39.78 78.49,39.47 74.22,39.47 73.91,39.78 73.91,42.52 v74.07,42.67
PG6  (1 unrouted)
PG7  (1 unrouted)
PG8  (via drill 0.25)  (5 unrouted)
  Top 0.152: IC2.38 96.05,41.03 94.34,39.32 v89.46,39.32 | v74.22,44.2 76.23,44.2 IC1.112
  Bottom 0.152: v89.46,39.32 88.85,39.32 87.63,38.1 87.17,38.1 86.26,37.19 85.65,37.19 84.58,38.25 83.06,38.25 81.84,39.47 79.1,39.47 78.64,39.01 74.22,39.01 73.61,39.62 73.61,42.06 73.46,42.22 73.46,43.43 v74.22,44.2
PG9  (1 unrouted)
PG10  (1 unrouted)
PG11  (1 unrouted)
PG12  (1 unrouted)
PG13  (1 unrouted)
PG14  (1 unrouted)
PG15  (via drill 0.25)  (1 unrouted)
  Top 0.152: IC2.17 84.7,41.03 v83.31,42.42 | v59.94,54.36 59.94,54.61 60.2,54.86 60.2,56.64 IC1.160
  Bottom 0.152: v83.31,42.42 83.31,43.59 83.57,43.92 83.57,54.41 82.96,55.04 60.71,55.04 v59.94,54.36
PH2  (1 unrouted)
PH3  (1 unrouted)
PH4  (1 unrouted)
PH5  (1 unrouted)
PH6  (1 unrouted)
PH7  (1 unrouted)
PH8  (1 unrouted)
PH9  (1 unrouted)
PH10  (1 unrouted)
PH11  (1 unrouted)
PH12  (1 unrouted)
PH13  (1 unrouted)
PH14  (1 unrouted)
PH15  (1 unrouted)
PI0  (1 unrouted)
PI1  (1 unrouted)
PI2  (1 unrouted)
PI3  (1 unrouted)
PI4  (1 unrouted)
PI5  (1 unrouted)
PI6  (1 unrouted)
PI7  (1 unrouted)
PI8  (1 unrouted)
PI9
  Top 0.178: IC1.11 44.97,49.18 43.51,50.65 43.51,57.58 47.6,61.67 47.6,68.78 47.07,69.32 47.07,70.74 JP2.31
PI10
  Top 0.178: IC1.12 44.94,48.68 43.16,50.47 43.16,57.76 45.64,60.25 45.64,72.16 JP2.30
PI11
  Top 0.178: IC1.13 44.91,48.18 42.8,50.29 42.8,57.94 45.11,60.25 45.11,68.78 44.58,69.32 44.58,70.69 JP2.29
USB_5V  (13 unrouted)
  Top 0.406: X1.1 9.63,21.92 9.91,21.64 9.91,17.01 R2_PWR_LED.1 | 2.9,28.85 3V3_LDO.3